# Altium PCB PCB1.PcbDoc
Units mil, origin at the board's own origin, x right, y up, seen from the top; angles counter-clockwise.
Board outline 6000 x 4000 mil, 2 copper layers (Top Layer, Bottom Layer); 12 components, 21 nets, 52 pads, 0 vias.
Unrouted connection lines stored in the file: 30.
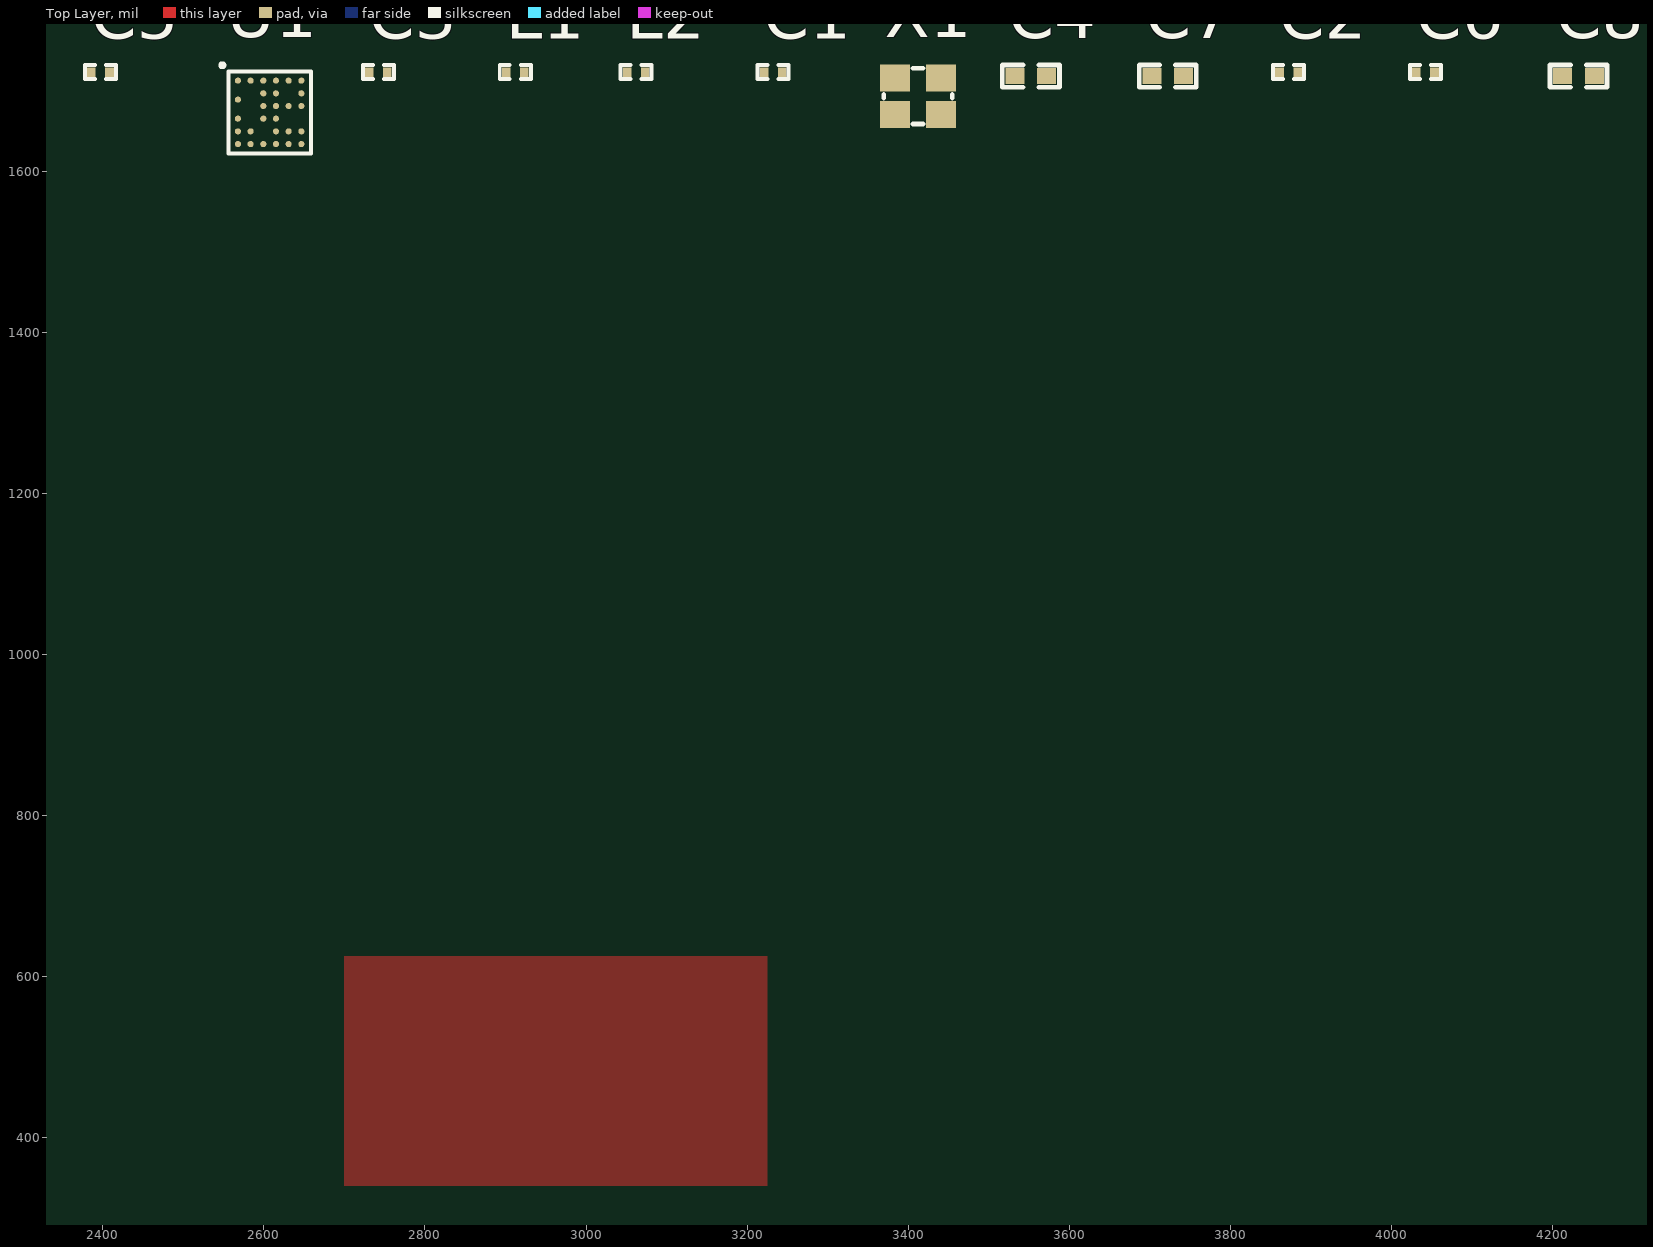
[diagram p0: Top Layer view]
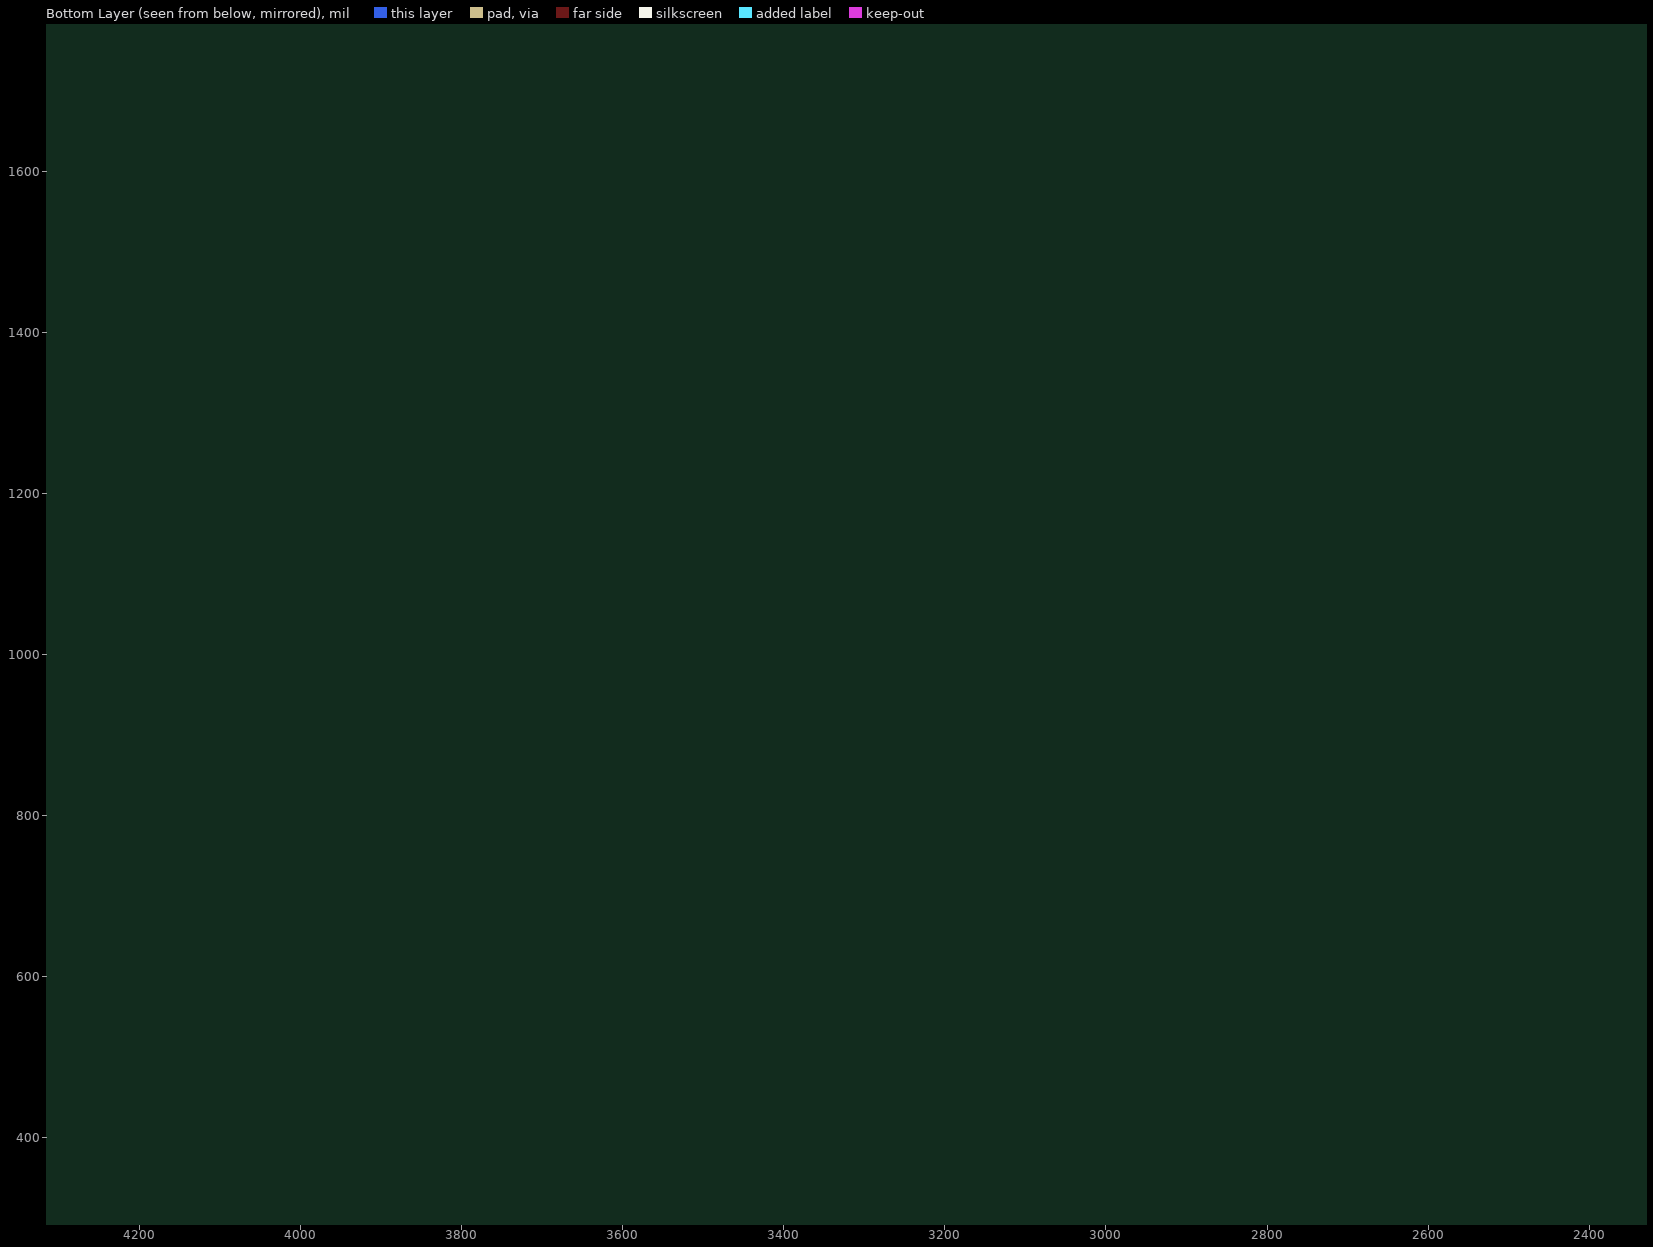
[diagram p1: Bottom Layer view, seen from below]

## Layer stack, top to bottom
Top Solder: solder mask 0.4, Solder Resist, Dk 3.5
Top Layer: signal copper 1.4
Dielectric 1: dielectric 12.6, FR-4, Dk 4.8
Bottom Layer: signal copper 1.4
Bottom Solder: solder mask 0.4, Solder Resist, Dk 3.5

## Board outline
0,0 6000,0 6000,4000 0,4000

## Design rules (kind name [scope] priority, off if disabled: settings)
Clearance [All] p1: gap=10 ignorepadtopadclearanceinfootprint=FALSE except(0: Arc-Hole Track-Hole SMDPad-Hole THPad-Hole Via-Hole Fill-Hole Poly-Hole Region-Hole Text-Hole)
PolygonConnect [All] p1: connectstyle=Relief reliefconductorwidth=10 reliefentries=4 polygonreliefangle="90 Angle" airgapwidth=10
RoutingVias [All] p1: holewidth=28 width=50 viastyle="Through Hole" minholewidth=28 minwidth=50 maxholewidth=28 maxwidth=50
SolderMaskExpansion [All] p1: expansion=4 istentingtop=FALSE
Width [All] p1: maxlimit=10 minlimit=10 preferedwidth=10
30 further rules are at their usual default settings.

## Components (designator, comment, footprint, x,y, rotation, side; value= is the part's Value field where it differs from the comment)
C1 "12pF" CAPC0603X03L_C 3232.13,1722.87 r0 top
C2 "12pF" CAPC0603X03L_C 3872.13,1722.87 r0 top
C3 "12pF" CAPC0603X03L_C 2742.13,1722.87 r0 top
C4 "2.2µF" CAPC1005X04L 3552.13,1717.87 r0 top
C5 "12pF" CAPC0603X03L_C 2397.13,1722.87 r0 top
C6 "12pF" CAPC0603X03L_C 4042.13,1722.87 r0 top
C7 "2.2µF" CAPC1005X04L 3722.13,1717.87 r0 top
C8 "2.2µF" CAPC1005X04L 4232.13,1717.87 r0 top
L1 "2.2nH" INDC0603X03L_C 2912.13,1722.87 r0 top
L2 "2.2nH" INDC0603X03L_C 3062.13,1722.87 r0 top
U1 "nRF52805-CAAA" BGA28C40P6X6_247X246X50 2607.13,1672.87 r0 top
X1 "32MHz" BT-XTAL_2016 3412.13,1692.87 r0 top

## Footprints (in the part's own frame and the unit in brackets; to place one, negate y for a bottom-side part, rotate by r counter-clockwise, add the part's x,y. Pads: shape width x height; smd on the part's side, far side on the other; paste and mask are expansions set on the pad)
BGA28C40P6X6_247X246X50 [mm]
  round 0.194 smd mask+0.05: A1(-1,1) A2(-0.6,1) A3(-0.2,1) A4(0.2,1) A5(0.6,1) A6(1,1) B3(-0.2,0.6) B4(0.2,0.6) B6(1,0.6) C1(-1,0.4) D3(-0.2,0.2) D4(0.2,0.2) D5(0.6,0.2) D6(1,0.2) E1(-1,-0.2) E3(-0.2,-0.2) E4(0.2,-0.2) F1(-1,-0.6) F2(-0.6,-0.6) F4(0.2,-0.6) F5(0.6,-0.6) F6(1,-0.6) G1(-1,-1) G2(-0.6,-1) G3(-0.2,-1) G4(0.2,-1) G5(0.6,-1) G6(1,-1)
  silkscreen extent -1.55,-1.29 1.3,1.55, body extent -1.23,-1.23 1.23,1.23, height 0.5
BT-XTAL_2016 [mm]
  rect 0.95x0.85 smd: 1(-0.725,-0.575) 2(0.725,-0.575) 3(0.725,0.575) 4(-0.725,0.575)
  silkscreen extent -1.08,-0.88 1.08,0.88, body extent -1.05,-0.85 1.05,0.85, height 0.56
CAPC0603X03L_C [mm]
  rect 0.27x0.3 smd: 1(-0.285,0) 2(0.285,0)
  silkscreen extent -0.49,-0.22 0.49,0.22, body extent -0.3,-0.15 0.31,0.15, height 0.3
CAPC1005X04L [mm]
  rect 0.6x0.5 smd: 1(-0.5,0) 2(0.5,0)
  silkscreen extent -0.9,-0.35 0.9,0.35, body extent -0.51,-0.25 0.51,0.25, height 0.5
INDC0603X03L_C [mm]
  rect 0.27x0.3 smd: 1(-0.285,0) 2(0.285,0)
  silkscreen extent -0.49,-0.22 0.49,0.22, body extent -0.31,-0.16 0.31,0.16, height 0.26

## Part data
C1 C2 C5 C6: library part CAP_0201, "Capacitor, NP0, ±2%", Part Number=C0201-12p, Footprint Doc=0201, LatestRevisionDate=2017-11-09, Pin Count=2, Published=2014-11-13, Publisher="Nordic Semiconductor"
C3: library part CAP_0201, "Capacitor, NP0, ±5%", Part Number=C0201-12p, Footprint Doc=0201, LatestRevisionDate=2017-11-09, Pin Count=2, Published=2014-11-13, Publisher="Nordic Semiconductor"
C4 C7 C8: library part CAP_0402, "Capacitor, X5R, ±20%", Part Number=C0402-2µ2, Footprint Doc=0402, LatestRevisionDate=2006-06-02, Pin Count=2, Published=2009-05-08, Publisher="Nordic Semiconductor"
L1 L2: library part IND_0201, "High frequency chip inductor ±5%", Part Number=L0201-2n2, Footprint Doc=0201, LatestRevisionDate=2013-04-10, Pin Count=2, Published=2013-04-10, Publisher="Nordic Semiconductor"
U1: library part nRF52805_CAAA, "Multi-protocol Bluetooth Low Energy, IEEE 802.15.4, ANT and 2.4GHz proprietary system-on-chip", Manufacturer="Nordic Semiconductor", Footprint Doc=WLCSP-28, LatestRevisionDate=2018-11-28, Manufacturer Part Number=nRF52805-CAAA, Part Number=nRF52805-CAAA, Pin Count=28, Published=2018-11-28, Publisher="Nordic Semiconductor"
X1: library part XTAL_SMD2016, "XTAL SMD 2016, 32MHz, Cl=8pF, Total Tol: ±40ppm", Part Number=XTAL_SMD2016_32MHz_8pF_General, Footprint Doc=XTAL_2016, LatestRevisionDate=2016-08-19, Pin Count=4, Published=2016-08-19, Publisher="Nordic Semiconductor"

## Nets (pads, with @x,y where several pads share a name; then routed paths per layer and width w, separated by ;. In a path a pad name is that pad's centre, name@x,y a point inside that pad or via, vN(x,y) a via of type N, cw(c..) or ccw(c..) an arc to the next point about the centre after c; other vN are vias at no path point)
DEC1: C4.1 U1.B6
DEC4_2: C6.2 C8.2 U1.A3 U1.A4
GND: C1.1 C2.1 C3.1 C4.2 C5.2 C6.1 C7.2 C8.1 U1.B3 U1.B4 U1.C1 U1.D3 U1.D4 U1.E3 U1.E4 X1.2 X1.4
NetC3_2: C3.2 L1.2 L2.1
NetL1_1: L1.1 U1.E1
P0.00/XL1: U1.D6
P0.01/XL2: U1.D5
P0.04/AIN2: U1.F5
P0.05/AIN3: U1.F6
P0.12: U1.G5
P0.14: U1.F4
P0.16: U1.G4
P0.18: U1.G3
P0.20: U1.F2
P0.21/R\E\S\E\T\: U1.G2
RF: L2.2
SWDCLK: U1.G1
SWDIO: U1.F1
VDD_nRF: C5.1 C7.1 U1.A6 U1.G6
XC1: C1.2 U1.A1 X1.1
XC2: C2.2 U1.A2 X1.3
pads on no net: U1.A5

## Polygon pours and split planes (outlines as drawn)
no net on Top Layer "NONET_L01_P001" (solid, pour order 1): 2700,625 3225,625 3225,340 2700,340